# EAGLE board irrigationControl (EAGLE 9.0.0)
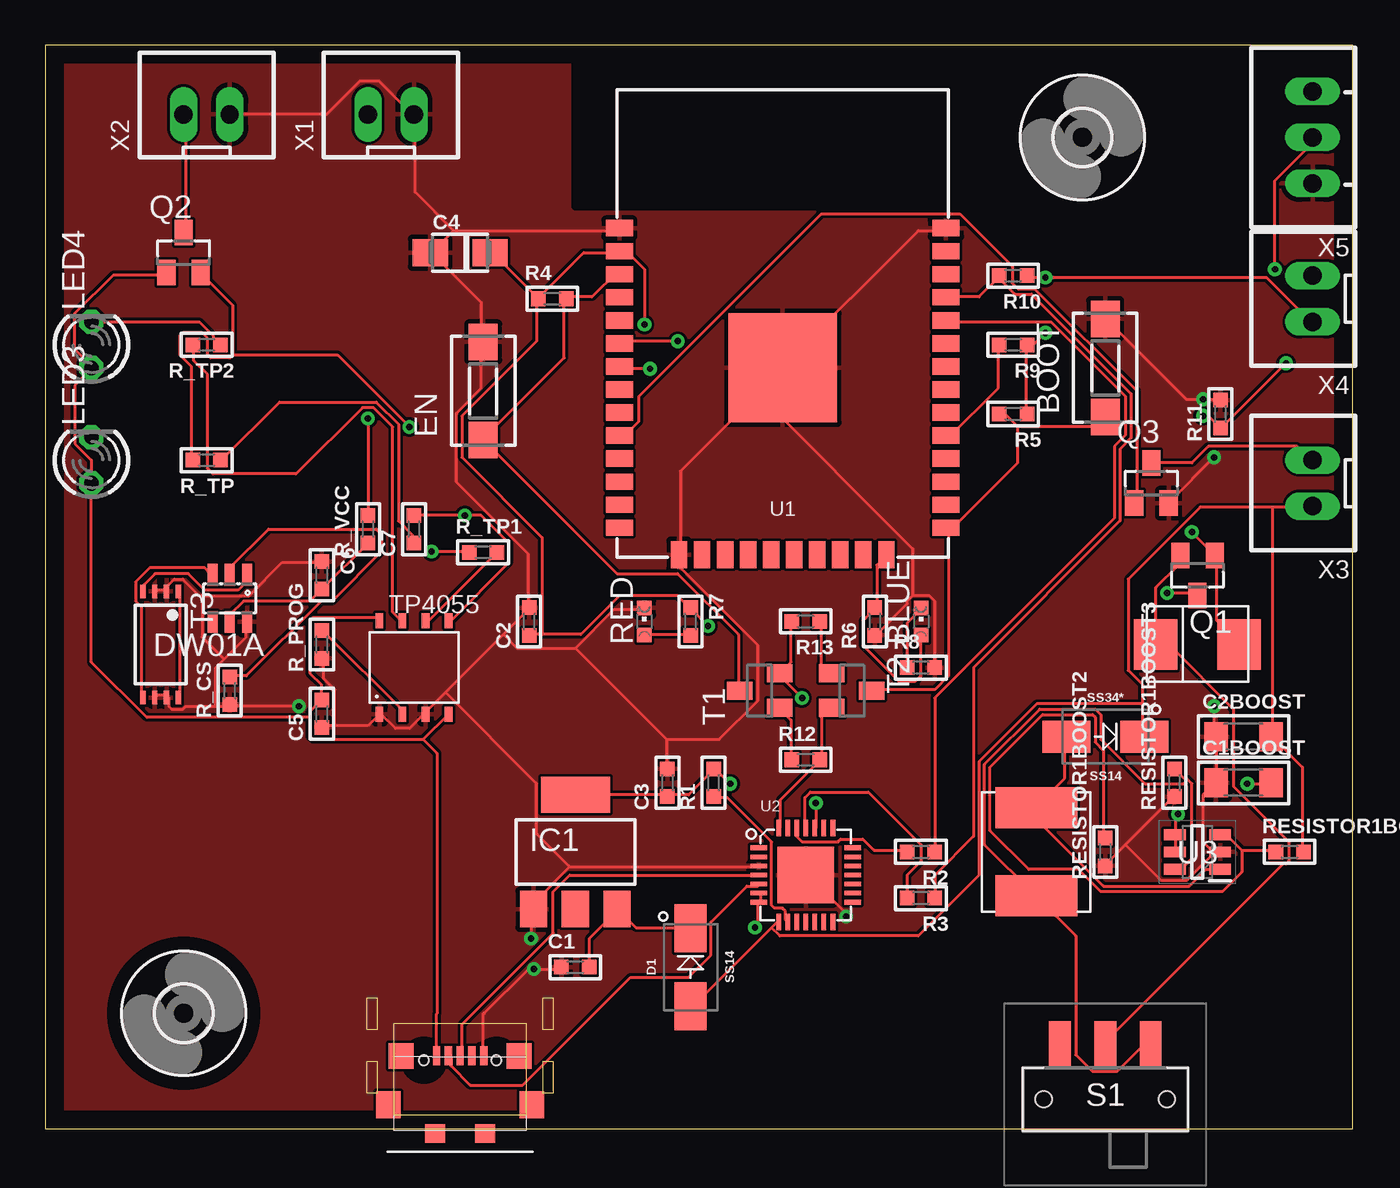
[diagram p0: board, top side]
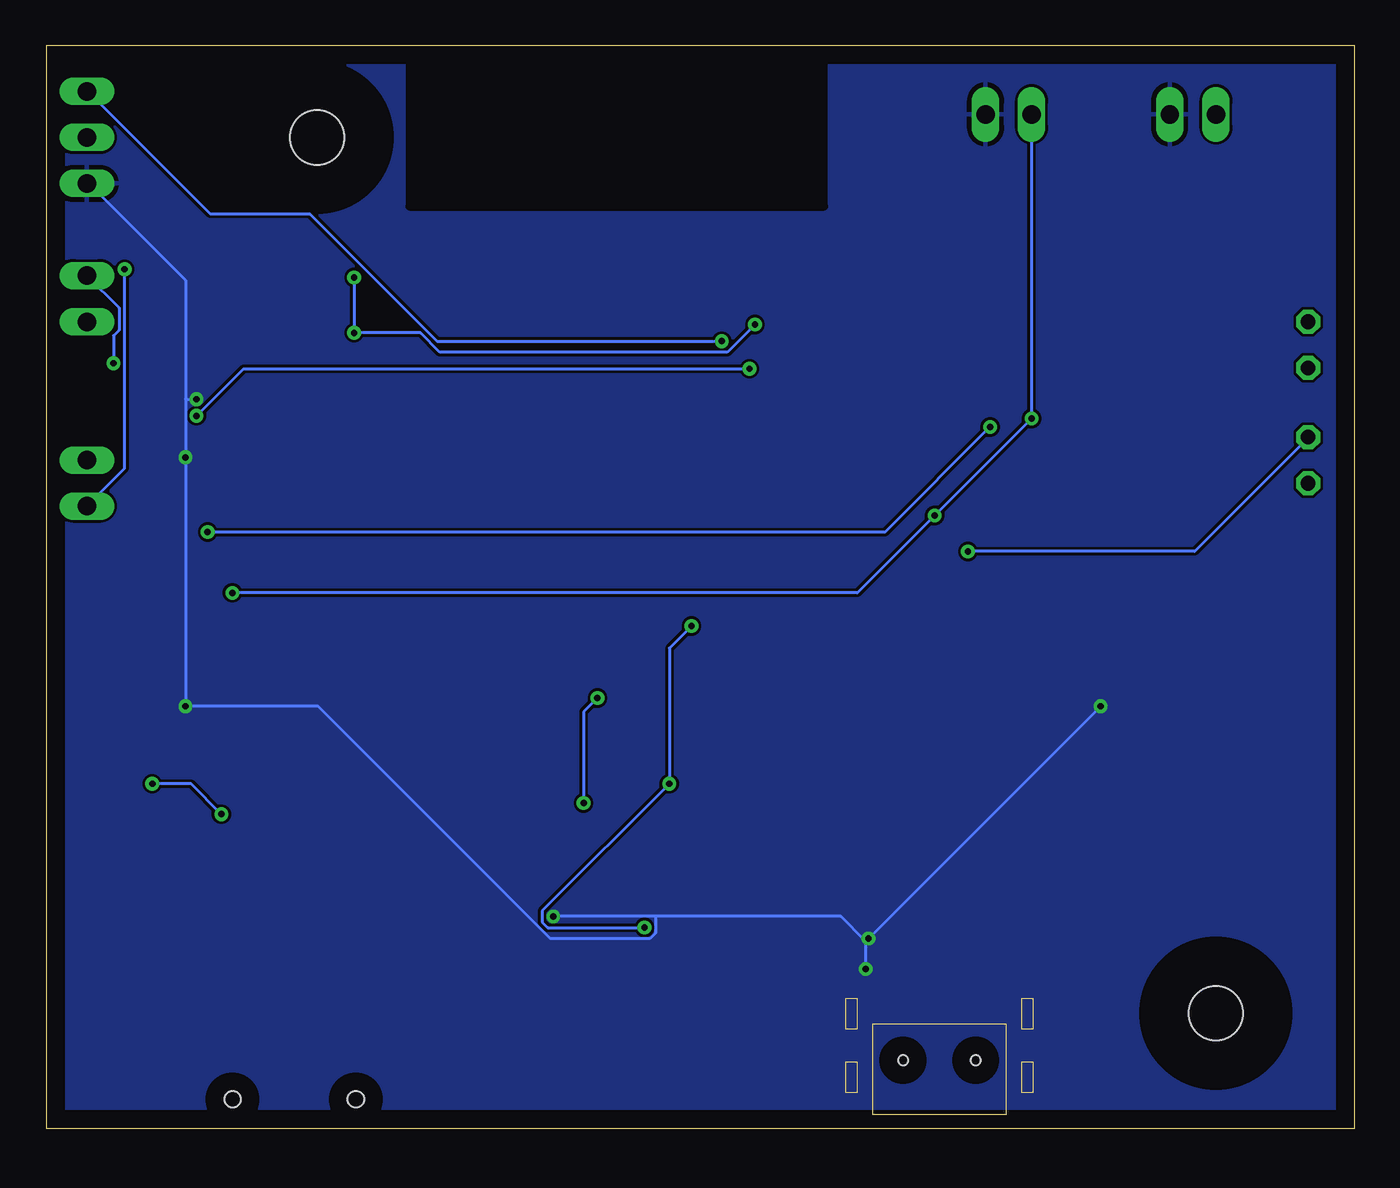
[diagram p1: board, bottom side, seen from below]

Size 72.06 x 59.68 mm. Coordinates in mm from the lower left corner, seen from the top.
Outline: 0,0 72.06,0 72.06,59.68 0,59.68 0,0
Copper layers (1*16): Top 0.035mm / dielectric 1.5mm / Bottom 0.035mm
Design rules "default": minimum track width 6mil, minimum drill 0.35mm, track to track 6mil, track to pad 6mil, pad to pad 6mil, via to via 6mil, smd to smd 6mil, copper to edge 40mil, drill to drill 6mil, minimum pad ring 10mil, minimum via ring 8mil, stop-mask expansion 4mil, vias tented up to drill 0mil, thermal gap 10mil

## Footprints (pad centres in the part's own frame; a part is rotated, then mirrored left to right if it is on the bottom)
CHIPLED_0603 = smd 0.8 x 0.8: A 0,-0.75; C 0,0.75
DTSM-3 = smd 2 x 1.6: 1 -2.7,0; 2 2.7,0
C0603 = smd 0.8 x 0.8: 1 -0.762,0; 2 0.762,0
C1206 = smd 1.3 x 1.6: 1 -1.524,0; 2 1.524,0
C3216-18/T = smd 1.95 x 1.5: + 1.651,0; - -1.651,0
DO214 = smd 2.65 x 1.75: ANODE -2.15,0; CATHODE 2.15,0
SOT23-6 = smd 0.55 x 1.2: 1 -0.95,-1.3; 2 0,-1.3; 3 0.95,-1.3; 4 0.95,1.3; 5 0,1.3; 6 -0.95,1.3
3,0 = hole 3: 0,0
SOT223 = smd 1.5 x 2: 1 -2.3,-3.15; 2 0,-3.15; 3 2.3,-3.15 | smd 3.8 x 2: 4 0,3.15
SLW6045S221MST = smd 2.26 x 4.52: 1 -2.425,0; 2 2.425,0
LED3MM = drill 0.813 octagon: A -1.27,0; K 1.27,0
SOT23 = smd 1 x 1.4: 1 -0.95,-1.1; 2 0.95,-1.1; 3 0,1.1
SOT-23 = smd 1 x 1.4: 1 -0.95,-1.1; 2 0.95,-1.1; 3 0,1.1
R0603 = smd 0.8 x 0.8: 1 -0.762,0; 2 0.762,0
K31280SF1 = smd 1.2 x 2.45: 1 -2.5,-3.413; 2 0,-3.413; 3 2.5,-3.413 | hole 0.9: -3.4,-0.338; 3.4,-0.338
TSSOP-8 = smd 0.3 x 0.75: 1 -0.975,-2.925; 2 -0.325,-2.925; 3 0.325,-2.925; 4 0.975,-2.925; 5 0.975,2.925; 6 0.325,2.925; 7 -0.325,2.925; 8 -0.975,2.925
SOT23-8 = smd 0.42 x 0.835: 1 -1.905,-2.58; 2 -0.635,-2.58; 3 0.635,-2.58; 4 1.905,-2.58; 5 1.905,2.58; 6 0.635,2.58; 7 -0.635,2.58; 8 -1.905,2.58
ESP-WROOM-32 = smd 0.9 x 1.5: 1 7.7,9; 2 6.43,9; 3 5.16,9; 4 3.89,9; 5 2.62,9; 6 1.35,9; 7 0.08,9; 8 -1.19,9; 9 -2.46,9; 10 -3.73,9; 11 -5,9; 12 -6.27,9; 13 -7.54,9; 14 -8.81,9; 25 -8.81,-9; 26 -7.54,-9; 27 -6.27,-9; 28 -5,-9; 29 -3.73,-9; 30 -2.46,-9; 31 -1.19,-9; 32 0.08,-9; 33 1.35,-9; 34 2.62,-9; 35 3.89,-9; 36 5.16,-9; 37 6.43,-9; 38 7.7,-9 | smd 1.5 x 0.9: 15 -10.3,5.715; 16 -10.3,4.445; 17 -10.3,3.175; 18 -10.3,1.905; 19 -10.3,0.635; 20 -10.3,-0.635; 21 -10.3,-1.905; 22 -10.3,-3.175; 23 -10.3,-4.445; 24 -10.3,-5.715 | smd 6 x 6: GND 0,0
QFN28G_0.5-5X5MM = smd 0.9 x 0.254: 1 -2.59,1.5; 2 -2.59,1; 3 -2.59,0.5; 4 -2.59,0; 5 -2.59,-0.5; 6 -2.59,-1; 7 -2.59,-1.5; 15 2.59,-1.5; 16 2.59,-1; 17 2.59,-0.5; 18 2.59,0; 19 2.59,0.5; 20 2.59,1; 21 2.59,1.5 | smd 0.254 x 0.9: 8 -1.5,-2.59; 9 -1,-2.59; 10 -0.5,-2.59; 11 0,-2.59; 12 0.5,-2.59; 13 1,-2.59; 14 1.5,-2.59; 22 1.5,2.59; 23 1,2.59; 24 0.5,2.59; 25 0,2.59; 26 -0.5,2.59; 27 -1,2.59; 28 -1.5,2.59 | smd 3.1 x 3.1: 29 0,0
SOT95P280X145-6N = smd 1.2 x 0.6: 1 -1.25,0.95; 2 -1.25,0; 3 -1.25,-0.95; 4 1.25,-0.95; 5 1.25,0; 6 1.25,0.95
MICRO-USB-2 = smd 1.4 x 1.4: 0 -3.25,2.735; 0.5 3.25,2.735 | smd 1.35 x 1.5: 0.1 -3.95,0.035; 0.4 3.95,0.035 | smd 1.1 x 1: 0.2 -1.38,-1.54; 0.3 1.38,-1.54 | smd 0.4 x 1.05: 1 -1.3,2.735; 2 -0.65,2.735; 3 0,2.735; 4 0.65,2.735; 5 1.3,2.735 | hole 0.55: -2,2.49; 2,2.49
S3MB = smd 2.4 x 2.8: + 2.3,0; - -2.3,0
JST-XH-02-PACKAGE-LONG-PAD = drill 1.016 long: 1 -1.27,0; 2 1.27,0
JST-XH-03-PACKAGE-LONG-PAD = drill 1.016 long: 1 -2.54,0; 2 0,0; 3 2.54,0

## Placement (x,y rotation side)
BLUE  blue  [CHIPLED_0603]  48.26,27.94 0 top
BOOT  DTSM-3  [DTSM-3]  58.42,41.91 90 top
C1  10u  [C0603]  29.21,8.89 0 top
C1BOOST  22uF  [C1206]  66.04,19.05 0 top
C2  100n  [C0603]  26.67,27.94 90 top
C2BOOST  22uF  [C1206]  66.04,21.59 0 top
C3  10u  [C0603]  34.29,19.05 90 top
C4  100uF/6.2V  [C3216-18/T]  22.86,48.26 0 top
C5  100n  [C0603]  15.24,22.86 90 top
C6  100n  [C0603]  15.24,30.48 270 top
C7  100n  [C0603]  20.32,33.02 90 top
D1  SS14  [DO214]  35.56,8.89 90 top
DW01A  DW01A  [SOT23-6]  10.16,29.21 180 top
EN  DTSM-3  [DTSM-3]  24.13,40.64 90 top
H1  MOUNT-HOLE3.0  [3,0]  7.62,6.35 0 top
H2  MOUNT-HOLE3.0  [3,0]  57.15,54.61 0 top
IC1  LD117AS33TR  [SOT223]  29.21,15.24 0 top
L_D  SLW6045S221MST  [SLW6045S221MST]  54.61,15.24 90 top
LED3  [LED3MM]  2.54,36.83 90 top
LED4  [LED3MM]  2.54,43.18 90 top
Q1  SST201  [SOT23]  63.5,30.48 180 top
Q2  SST201  [SOT23]  7.62,48.26 0 top
Q3  [SOT-23]  60.96,35.56 0 top
R1  4.7k  [R0603]  36.83,19.05 90 top
R2  1k  [R0603]  48.26,15.24 180 top
R3  1k  [R0603]  48.26,12.7 180 top
R4  10k  [R0603]  27.94,45.72 0 top
R5  10k  [R0603]  53.34,39.37 180 top
R6  10k  [R0603]  45.72,27.94 90 top
R7  10k  [R0603]  35.56,27.94 270 top
R8  10k  [R0603]  48.26,25.4 0 top
R9  10k  [R0603]  53.34,43.18 180 top
R10  10k  [R0603]  53.34,46.99 180 top
R11  10k  [R0603]  64.77,39.37 90 top
R12  10k  [R0603]  41.91,20.32 0 top
R13  10k  [R0603]  41.91,27.94 180 top
R_CS  1k  [R0603]  10.16,24.13 90 top
R_PROG  1.2k  [R0603]  15.24,26.67 90 top
R_TP  10k  [R0603]  8.89,36.83 180 top
R_TP1  1k  [R0603]  24.13,31.75 0 top
R_TP2  1k  [R0603]  8.89,43.18 180 top
R_VCC  100  [R0603]  17.78,33.02 90 top
RED  red  [CHIPLED_0603]  33.02,27.94 0 top
RESISTOR1BOOST  16.5k  [R0603]  68.58,15.24 0 top
RESISTOR1BOOST2  2.2k  [R0603]  58.42,15.24 90 top
RESISTOR1BOOST3  20k  [R0603]  62.23,19.05 90 top
S1  K3-1280S-F1  [K31280SF1]  58.42,1.27 180 top
SS34*  SS14  [DO214]  58.42,21.59 0 top
T1  BC846  [SOT23]  39.37,24.13 90 top
T2  BC846  [SOT23]  44.45,24.13 270 top
T3  DMN3024LSD  [TSSOP-8]  6.35,26.67 180 top
TP4055  TP4056  [SOT23-8]  20.32,25.4 0 top
U1  ESP-WROOM-32  [ESP-WROOM-32]  40.64,41.91 90 top
U2  INTERFACE-CP2102-GMR(QFN28)  [QFN28G_0.5-5X5MM]  41.91,13.97 0 top
U3  MT3608  [SOT95P280X145-6N]  63.5,15.24 180 top
U$1  MICRO-USB  [MICRO-USB-2]  22.86,1.27 0 top
U$9  S3MB  [S3MB]  63.5,26.67 0 top
X1  JST-XH-02-PIN-LONG-PAD  [JST-XH-02-PACKAGE-LONG-PAD]  19.05,55.88 0 top
X2  JST-XH-02-PIN-LONG-PAD  [JST-XH-02-PACKAGE-LONG-PAD]  8.89,55.88 0 top
X3  JST-XH-02-PIN-LONG-PAD  [JST-XH-02-PACKAGE-LONG-PAD]  69.85,35.56 90 top
X4  JST-XH-02-PIN-LONG-PAD  [JST-XH-02-PACKAGE-LONG-PAD]  69.85,45.72 90 top
X5  JST-XH-03-PIN-LONG-PAD  [JST-XH-03-PACKAGE-LONG-PAD]  69.85,54.61 90 top

## Library data of the parts
BLUE LED3 LED4 RED = led
BOOT EN = switch-tact
C1 C1BOOST C2 C2BOOST C3-C7 R1-R13 R_CS R_PROG R_TP R_TP1 R_TP2 R_VCC RESISTOR1BOOST RESISTOR1BOOST2 RESISTOR1BOOST3 = rc-master-smd
D1 SS34* = SS14; AVAILABILITY: In Stock; DESCRIPTION: Diode Schottky 40V 1A Surface Mount DO-214AC (SMA); MF: ON Semiconductor; MP: SS14; PACKAGE: SMA-2 ON Semiconductor; PRICE: None; PURCHASE-URL: https://pricing.snapeda.com/search/part/SS14/?ref=eda
DW01A = DW01A
H1 H2 = holes
IC1 = v-reg
L_D U$1 U$9 = SX1308
Q1 Q2 = transistor-fet
Q3 = dp_devices
S1 = K3-1280S-F1; DESCRIPTION: Toggle Switches SMD RoHS; HEIGHT: 3.7mm; MANUFACTURER_NAME: Korean Hroparts Elec; MANUFACTURER_PART_NUMBER: K3-1280S-F1
T1 T2 = transistor-neu-to92
T3 = FS8205A
TP4055 = TP4056
U1 = esp32
U2 = CP2102-GMR_QFN28_; AVAILABILITY: In Stock; DESCRIPTION: USB Bridge, USB to UART USB 2.0 UART Interface 28-QFN (5x5); MF: Silicon; MP: CP2102-GMR; PACKAGE: VFQFN-28 Vishay Siliconix; PRICE: None; PURCHASE-URL: https://pricing.snapeda.com/search/part/CP2102-GMR/?ref=eda
U3 = MT3608; DESCRIPTION: High Efficiency 1.2MHz 2A Step Up Converter; HEIGHT: 1.45mm; MANUFACTURER_NAME: Aerosemi; MANUFACTURER_PART_NUMBER: MT3608
X1-X5 = Rembrandt Electronics - JST XH Connectors v1-0

## Nets
3.7V: C1BOOST.2 L_D.1 S1.1 U3.4 U3.5
BOOT: BOOT.1 R5.2 T2.3 U1.25
D+: U2.4 U$1.3
D-: U2.5 U$1.2
DTR: R12.2 T2.2 U2.28
EN: EN.1 R4.2 T1.3 U1.3
GND: BOOT.2 C1.1 C1BOOST.1 C2.2 C2BOOST.1 C3.2 C4.- C5.1 C6.1 DW01A.6 EN.2 IC1.1 Q3.2 R6.1 R8.2 R11.2 R_CS.1 R_PROG.1 RED.C RESISTOR1BOOST2.1 RESISTOR1BOOST3.1 T3.2 T3.3 T3.6 T3.7 TP4055.1 TP4055.3 U1.1 U1.15 U1.38 U1.GND U2.3 U2.29 U3.2 U$1.5 X1.2 X2.2 X5.1
GPIO1: R3.1 R10.2 U1.35
GPIO2: BLUE.A R6.2 U1.24
GPIO3: R2.1 U1.34
GPIO5: R9.2 U1.29
GPIO25: Q3.1 U1.10
GPIO34: U1.6 X5.3
GPIO35: R11.1 U1.7 X4.2
N$1: R1.1 U2.9
N$2: R2.2 U2.26
N$3: R3.2 U2.25
N$5: R12.1 T1.1
N$6: R13.1 T2.1
N$7: BLUE.C R8.1
N$9: Q3.3 X3.2
N$10: L_D.2 SS34*.ANODE U3.1
N$11: RESISTOR1BOOST2.2 RESISTOR1BOOST.1 U3.3
N$14: RESISTOR1BOOST3.2 U3.6
N$15: LED3.K R_TP1.1
N$16: LED4.K R_TP2.1
N$23: R7.2 RED.A
N$29: R_TP2.2 TP4055.7
N$30: R_TP1.2 TP4055.6
N$31: R_PROG.2 TP4055.2
N$32: T3.1 T3.8
N$33: DW01A.3 T3.5
N$34: DW01A.2 R_CS.2
N$35: DW01A.1 T3.4
N$36: C6.2 DW01A.5 R_VCC.1
ON: Q1.2 S1.2 U$9.-
OUT-: C7.1 R_TP.1
OUT/B+: C7.2 Q1.3 R_VCC.2 TP4055.5 X1.1
RTS: R13.2 T1.2 U2.24
SOLAR+: Q2.3 X2.1
VCC_PMOSFET: Q1.1 Q2.2 R_TP.2 U$9.+
VCC_USB: C5.2 LED3.A LED4.A Q2.1 TP4055.4 TP4055.8 U$1.1
VDD3V3: C2.1 C3.1 C4.+ IC1.4 R1.2 R4.1 R5.1 R7.1 R9.1 R10.1 U1.2 U2.6 U2.7 X4.1
VIN: C1.2 D1.CATHODE IC1.3
VOUT: C2BOOST.2 D1.ANODE RESISTOR1BOOST.2 SS34*.CATHODE U2.8 X3.1 X5.2

## Tracks (layer width: path | path; a pad name or v marks a point on that pad's centre or on a via)
3.7V  (via drill 0.35)
  Top 0.152: U3.5 62.28,15.34 62.28,16.1 U3.4 62.28,16.26 62.28,17.17 v62.43,17.32 62.89,17.78 62.89,18.85 62.74,19 60.6,19 58.17,21.44 58.17,22.81 57.86,23.11 54.81,23.11 51.77,20.07 51.77,15.65 54.51,12.9 L_D.1 54.66,12.75 56.79,10.62 56.79,4.06 57.71,3.15 59.08,3.15 60.6,4.67 60.91,4.67 S1.1 | v66.24,19 67.46,19 C1BOOST.2
  Bottom 0.152: v66.24,19 64.11,19 v62.43,17.32
BOOT
  Top 0.152: 53.59,38.66 52.98,39.27 52.68,39.27 R5.2 | 53.59,38.66 57.86,38.66 58.32,39.12 BOOT.1 | 49.78,32.87 49.78,33.02 U1.25 49.78,32.87 | 49.78,32.87 49.78,24.94 49.02,24.18 45.67,24.18 T2.3 | 53.59,38.66 53.59,36.68 49.78,32.87
D+
  Top 0.152: U2.4 28.9,13.97 27.99,13.06 27.99,10.77 22.96,5.74 22.96,4.06 U$1.3
D-
  Top 0.152: U2.5 39.27,13.36 38.66,13.36 36.68,11.38 36.68,9.55 35.46,8.33 32.26,8.33 26.31,2.39 23.42,2.39 22.35,3.45 22.35,3.91 U$1.2
DTR
  Top 0.152: T2.2 43.23,23.11 42.77,22.66 42.77,20.37 R12.2 42.62,20.22 40.49,18.09 40.49,16.56 U2.28
EN
  Top 0.152: U1.3 31.5,47.19 30.12,45.82 28.75,45.82 R4.2 28.6,45.67 28.6,42.47 24.18,38.05 EN.1 24.18,37.9 31.5,30.58 34.85,30.58 38.2,27.23 38.2,24.18 T1.3
GND  (via drill 0.35)
  Top 0.152: U$1.5 24.13,4.04 24.13,6.35 24.18,6.35 26.62,8.79 v26.92,8.79 28.45,8.79 C1.1 | 59.54,15.65 62.13,18.24 RESISTOR1BOOST3.1 | 59.54,15.65 58.47,14.58 RESISTOR1BOOST2.1 | 64.57,15.34 64.26,15.34 63.8,15.8 63.8,18.39 64.41,19 C1BOOST.1 64.57,19.15 64.57,21.59 C2BOOST.1 64.41,21.59 v64.41,23.27 | 64.57,15.34 64.72,15.34 U3.2 64.57,15.34 | 59.54,15.65 61.52,13.66 62.89,13.66 64.57,15.34 | R11.2 64.72,40.18 v63.8,40.18 62.89,40.18 58.47,44.6 BOOT.2 | v64.41,36.98 61.98,34.54 Q3.2 | 47.8,29.36 47.5,29.06 47.5,28.91 45.82,27.23 R6.1 | 47.8,29.36 48.72,29.36 49.02,29.06 R8.2 | 39.27,40.49 40.64,41.86 U1.GND | 39.27,40.49 35,36.22 35,31.65 U1.15 35,31.5 35,30.89 39.27,26.62 39.27,23.57 37.14,21.44 34.24,21.44 | U1.38 49.63,49.48 48.11,49.48 40.64,42.01 U1.GND | 47.8,29.36 47.8,31.95 39.27,40.49 | 39.27,40.49 U1.GND | X2.2 15.49,55.88 17.32,57.71 18.39,57.71 20.22,55.88 X1.2 20.37,55.88 20.37,51.61 22.5,49.48 | 22.5,49.48 31.5,49.48 U1.1 | 21.29,48.26 22.5,49.48 | 21.29,48.26 24.03,45.52 24.03,43.38 EN.2 24.03,43.23 24.03,40.79 22.66,39.42 22.66,35.61 26.62,31.65 26.62,28.75 C2.2 26.62,28.6 25.25,27.23 | 21.29,48.26 C4.- | 15.95,22.2 17.78,22.2 18.39,22.81 TP4055.1 18.54,22.81 19.3,22.05 20.07,22.05 20.83,22.81 TP4055.3 20.98,22.96 22.05,24.03 | 15.95,22.2 15.34,22.2 C5.1 | 15.95,22.2 15.95,24.18 15.34,24.79 15.34,25.86 R_PROG.1 | 22.05,24.03 25.25,27.23 | 29.21,26.47 31.34,28.6 33.02,28.6 RED.C | 29.21,26.47 26.01,26.47 25.25,27.23 | 34.24,21.44 34.24,19.91 C3.2 | 29.21,26.47 34.24,21.44 | T3.6 6.05,23.88 6.66,23.88 T3.7 6.81,23.72 6.81,23.27 6.96,23.11 7.57,23.11 7.72,23.27 9.4,23.27
  Top 0.152: 9.4,23.27 10.16,23.27 | 9.86,25.86 9.4,25.4 9.4,23.27 | 9.86,25.86 11.07,27.08 11.07,27.84 DW01A.6 | 6.5,29.67 6.66,29.67 T3.2 | 6.5,29.67 6.05,29.67 T3.3 | 8.64,29.36 8.48,29.36 7.57,30.28 7.11,30.28 6.5,29.67 | 8.64,29.36 11.23,29.36 13.06,31.19 15.19,31.19 C6.1 | 9.86,25.86 8.64,27.08 8.64,29.36 | 28.9,14.43 39.27,14.43 U2.3 | 28.9,14.43 26.92,12.45 26.92,12.14 IC1.1 26.77,11.99 v26.77,10.46 | v44.14,11.68 44.14,11.84 42.01,13.97 U2.29 | v13.97,23.27 10.16,23.27 | 10.16,23.27 R_CS.1 | 22.05,24.03 27.08,19 27.08,16.26 28.9,14.43
  Bottom 0.152: 64.41,40.18 64.41,46.74 69.75,52.07 X5.1 | 64.41,40.18 v64.41,36.98 v64.41,23.27 57.1,23.27 44.3,10.46 38.81,10.46 38.51,10.77 38.51,11.68 | 64.41,40.18 v63.8,40.18 | 26.92,10.31 v26.92,8.79 | 38.51,11.68 28.3,11.68 26.92,10.31 | 38.51,11.68 v44.14,11.68 | 26.92,10.31 v26.77,10.46 v13.97,23.27
  pour Top (isolate 0.152): 0,59.69 72.39,59.69 72.39,0 71.12,0 0,0
  pour Bottom (isolate 0.152): 0,59.69 72.39,59.69 72.39,0 0,0
GPIO1
  Top 0.152: R3.1 49.02,13.97 51.16,16.1 51.16,25.4 59.23,33.48 59.23,37.44 59.84,38.05 59.84,40.49 54.36,45.97 53.44,45.97 52.53,46.89 | 52.53,46.89 51.46,45.82 49.78,45.82 U1.35 | 52.53,46.89 R10.2
GPIO2
  Top 0.152: U1.24 46.28,31.5 45.82,31.04 45.82,28.75 R6.2 45.67,28.6 45.06,27.99 45.06,26.62 47.04,24.64 47.95,24.64 48.26,24.94 BLUE.A
GPIO3
  Top 0.152: R2.1 49.02,23.72 58.93,33.63 58.93,37.59 59.54,38.2 59.54,40.34 55.42,44.45 49.78,44.45 U1.34
GPIO5
  Top 0.152: R9.2 52.53,43.08 52.53,40.79 49.78,38.05 U1.29
GPIO25
  Top 0.152: Q3.1 60.15,34.54 60.15,40.64 54.51,46.28 53.59,46.28 53.29,46.58 53.29,47.5 50.39,50.39 42.77,50.39 32.72,40.34 32.72,38.96 31.95,38.2 31.65,38.2 U1.10
GPIO34  (via drill 0.35)
  Top 0.152: v34.85,43.38 31.65,43.38 U1.6
  Bottom 0.152: v34.85,43.38 50.55,43.38 57.56,50.39 63.04,50.39 69.75,57.1 X5.3
GPIO35  (via drill 0.35)
  Top 0.152: v68.38,42.16 64.87,38.66 R11.1 64.11,39.27 v63.8,39.27 | v33.33,41.86 31.65,41.86 U1.7
  Bottom 0.152: v68.38,42.16 68.38,43.69 68.07,43.99 68.07,45.21 X4.2 | v33.33,41.86 61.21,41.86 v63.8,39.27
N$1
  Top 0.152: R1.1 36.83,18.24 37.59,18.24 40.03,15.8 40.03,12.29 40.18,12.14 40.64,12.14 40.79,11.99 40.79,11.53 U2.9
N$2
  Top 0.152: R2.2 47.5,15.34 45.67,15.34 45.06,15.95 43.84,15.95 43.69,15.8 41.71,15.8 41.4,16.1 41.4,16.41 U2.26
N$3
  Top 0.152: R3.2 47.5,13.97 48.26,14.73 48.26,15.65 45.36,18.54 42.16,18.54 41.86,18.24 41.86,16.56 U2.25
N$5
  Top 0.152: R12.1 41.1,20.37 41.1,22.5 40.49,23.11 T1.1
N$6
  Top 0.152: R13.1 42.77,27.84 42.77,25.55 43.23,25.09 T2.1
N$7
  Top 0.152: R8.1 47.5,27.84 48.26,28.6 BLUE.C
N$9
  Top 0.152: Q3.3 61.06,36.68 63.19,36.68 64.11,37.59 68.99,37.59 69.75,36.83 X3.2
N$10
  Top 0.152: U3.1 64.72,14.27 63.96,14.27 63.04,13.36 58.32,13.36 54.66,17.02 54.66,17.63 L_D.2 54.66,17.78 56.19,19.3 56.19,21.59 SS34*.ANODE
N$11
  Top 0.152: 65.94,15.34 67.77,15.34 RESISTOR1BOOST.1 | 65.94,15.34 65.18,16.1 64.87,16.1 U3.3 | 65.94,15.34 65.94,14.12 64.87,13.06 58.17,13.06 56.95,14.27 54.2,14.27 52.07,16.41 52.07,19.91 54.97,22.81 57.71,22.81 57.86,22.66 57.86,21.28 58.32,20.83 58.32,16.1 RESISTOR1BOOST2.2
N$14
  Top 0.152: RESISTOR1BOOST3.2 62.74,19.3 62.89,19.3 63.19,19 63.19,14.88 62.74,14.43 62.28,14.43 U3.6
N$15  (via drill 0.35)
  Top 0.152: v21.29,31.8 23.27,31.8 R_TP1.1
  Bottom 0.152: v21.29,31.8 8.79,31.8 2.54,38.05 LED3.K
N$16
  Top 0.152: LED4.K 8.48,44.45 9.25,43.69 9.25,43.54 9.55,43.23 R_TP2.1
N$23
  Top 0.152: R7.2 35.46,27.23 33.02,27.23 RED.A
N$29
  Top 0.152: R_TP2.2 8.18,43.08 8.18,42.32 8.94,41.55 8.94,36.37 9.25,36.07 13.82,36.07 17.48,39.73 18.09,39.73 19.15,38.66 19.15,28.45 19.61,27.99 TP4055.7
N$30
  Top 0.152: R_TP1.2 20.98,27.84 TP4055.6
N$31
  Top 0.152: R_PROG.2 15.34,27.38 19.76,22.96 TP4055.2
N$32
  Top 0.152: T3.8 7.42,23.88 7.42,29.52 T3.1
N$33
  Top 0.152: T3.5 5.28,23.88 5.28,28.75 4.98,29.06 4.98,30.12 5.74,30.89 8.79,30.89 9.09,30.58 DW01A.3
N$34
  Top 0.152: DW01A.2 10.16,30.89 12.29,33.02 18.24,33.02 18.54,32.71 18.54,31.8 15.8,29.06 15.19,29.06 11.07,24.94 10.16,24.94 R_CS.2
N$35
  Top 0.152: T3.4 5.44,29.67 5.44,29.97 6.05,30.58 7.87,30.58 8.79,29.67 10.62,29.67 11.07,30.12 11.07,30.43 DW01A.1
N$36
  Top 0.152: R_VCC.1 C6.2 14.58,29.06 10.92,29.06 10.16,28.3 DW01A.5
ON
  Top 0.152: Q1.2 62.43,31.5 62.43,31.04 61.21,29.82 61.21,26.77 U$9.- 61.21,26.62 61.98,26.62 65.48,23.11 65.48,18.85 68.53,15.8 68.53,14.73 68.38,14.58 68.22,14.58 58.47,4.83 S1.2
OUT-
  Top 0.152: C7.1 20.22,32.26 20.22,32.71 19.46,33.48 19.46,38.81 18.24,40.03 12.9,40.03 9.7,36.83 R_TP.1
OUT/B+  (via drill 0.35)
  Top 0.152: C7.2 v23.11,33.78 24.03,33.78 25.55,32.26 25.55,31.19 22.35,27.99 TP4055.5 | v17.78,39.12 R_VCC.2 | v61.82,29.52 63.5,29.52 Q1.3
  Bottom 0.152: X1.1 v17.78,39.12 v23.11,33.78 27.38,29.52 v61.82,29.52
RTS  (via drill 0.35)
  Top 0.152: R13.2 41.1,27.84 41.1,25.7 40.49,25.09 T1.2 40.49,24.94 v41.71,23.72 | v42.47,17.93 42.47,16.56 U2.24
  Bottom 0.152: v42.47,17.93 42.47,22.96 v41.71,23.72
SOLAR+
  Top 0.152: Q2.3 7.72,49.48 7.72,55.88 X2.1
VCC_PMOSFET  (via drill 0.35)
  Top 0.152: U$9.+ 65.79,26.77 64.57,27.99 64.57,31.5 Q1.1 64.41,31.65 v63.19,32.87 | 10.31,42.62 10.16,42.47 9.09,42.47 8.94,42.62 8.94,43.54 8.64,43.84 7.57,43.84 7.42,43.69 7.42,42.62 8.03,42.01 8.03,36.83 R_TP.2 | 10.31,42.62 10.31,45.36 8.64,47.04 Q2.2 | v20.07,38.66 16.1,42.62 10.31,42.62
  Bottom 0.152: v63.19,32.87 25.86,32.87 v20.07,38.66
VCC_USB
  Top 0.152: U$1.1 21.56,6.32 21.59,6.35 21.59,20.68 20.83,21.44 | Q2.1 6.66,47.04 3.76,47.04 1.63,44.91 1.63,42.93 2.54,42.01 LED4.A 2.54,41.86 1.63,40.95 1.63,37.74 2.54,36.83 LED3.A 2.54,25.7 5.59,22.66 14.58,22.66 | TP4055.8 18.39,27.99 18.24,28.14 14.73,28.14 14.58,27.99 14.58,25.09 15.19,24.49 15.19,23.72 C5.2 14.58,22.96 14.58,22.66 | 20.83,21.44 22.2,22.81 TP4055.4 | 20.83,21.44 14.73,21.44 14.58,21.59 14.58,22.66
VDD3V3  (via drill 0.35)
  Top 0.152: U2.6 39.42,12.9 39.42,12.45 U2.7 39.27,12.45 39.27,11.23 v39.12,11.07 | v37.74,19 36.83,19.91 R1.2 36.83,19.76 35.46,18.39 34.39,18.39 C3.1 34.24,18.39 IC1.4 | IC1.4 | R5.1 54.05,39.42 54.05,43.08 R9.1 54.2,43.23 54.51,43.23 v55.12,43.84 | R10.1 54.2,46.89 v55.12,46.89 67.31,46.89 69.75,44.45 X4.1 | 27.38,27.23 29.52,27.23 31.65,29.36 34.85,29.36 35.46,28.75 R7.1 35.61,28.6 v36.53,27.69 | 27.38,27.23 26.77,27.23 C2.1 | R4.1 24.64,48.26 C4.+ | R4.1 27.23,45.82 29.67,48.26 31.5,48.26 U1.2 31.65,48.26 32.11,48.26 33.02,47.35 v33.02,44.3 | 27.38,27.23 27.38,32.56 22.96,36.98 22.96,39.27 27.08,43.38 27.08,45.67 R4.1
  Bottom 0.152: v39.12,11.07 44.45,11.07 44.75,11.38 44.75,11.99 v37.74,19 37.74,26.47 v36.53,27.69 | v55.12,46.89 v55.12,43.84 51.46,43.84 50.39,42.77 34.54,42.77 v33.02,44.3
VIN
  Top 0.152: C1.2 29.97,10.46 31.5,11.99 IC1.3 31.65,11.99 32.56,11.07 35.46,11.07 D1.CATHODE
VOUT  (via drill 0.35)
  Top 0.152: 40.03,11.07 35.61,6.66 D1.ANODE | 40.03,11.07 40.33,11.38 U2.8 | 67.61,21.59 69.29,19.91 69.29,15.34 RESISTOR1BOOST.2 | 60.45,23.42 60.45,24.49 59.69,25.25 59.69,30.28 63.65,34.24 67.61,34.24 | 60.45,23.42 60.45,21.59 SS34*.CATHODE | 67.61,34.24 69.75,34.24 X3.1 | v67.77,47.35 67.77,52.22 69.75,54.2 69.75,54.51 X5.2 | 67.61,34.24 67.61,21.59 | 67.61,21.59 C2BOOST.2 | 40.03,11.07 40.49,10.62 48.11,10.62 51.46,13.97 51.46,20.22 54.66,23.42 60.45,23.42
  Bottom 0.152: v67.77,47.35 67.77,36.37 X3.1